# EAGLE board Automaton (EAGLE 5.11)

Size 100 x 80 mm. Coordinates in mm from the lower left corner, seen from the top.
Outline: 0,0 100,0 100,80 0,80 0,0
Copper layers (1*16): Top 0.035mm / dielectric 1.5mm / Bottom 0.035mm
Design rules "default": minimum track width 10mil, minimum drill 24mil, track to track 8mil, track to pad 8mil, pad to pad 8mil, via to via 8mil, smd to smd 8mil, copper to edge 40mil, drill to drill 8mil, minimum pad ring 10mil, minimum via ring 8mil, stop-mask expansion 4mil, vias tented up to drill 0mil, thermal gap 10mil

## Footprints (pad centres in the part's own frame; a part is rotated, then mirrored left to right if it is on the bottom)
C025-024X044 = drill 0.813 octagon: 1 -1.27,0; 2 1.27,0
1210 = smd 1.2 x 2: 1 -1.6,0; 2 1.6,0
SO16 = smd 0.66 x 2.032: 1 -4.445,-3.073; 2 -3.175,-3.073; 3 -1.905,-3.073; 4 -0.635,-3.073; 5 0.635,-3.073; 6 1.905,-3.073; 7 3.175,-3.073; 8 4.445,-3.073; 9 4.445,3.073; 10 3.175,3.073; 11 1.905,3.073; 12 0.635,3.073; 13 -0.635,3.073; 14 -1.905,3.073; 15 -3.175,3.073; 16 -4.445,3.073
SMARTLED-TTW = smd 0.8 x 0.5: A 0,-0.875; C 0,0.875 | smd 0.35 x 0.35: A@1 0,-0.5; C@1 0,0.5
M0805 = smd 1.3 x 1.6: 1 -0.95,0; 2 0.95,0
SOMC16 = smd 1.91 x 0.64: 1 -3.62,4.445; 2 -3.62,3.175; 3 -3.62,1.905; 4 -3.62,0.635; 5 -3.62,-0.635; 6 -3.62,-1.905; 7 -3.62,-3.175; 8 -3.62,-4.445; 9 3.62,-4.445; 10 3.62,-3.175; 11 3.62,-1.905; 12 3.62,-0.635; 13 3.62,0.635; 14 3.62,1.905; 15 3.62,3.175; 16 3.62,4.445
CTS753DRT24 = smd 0.43 x 1.27: 1 -3.525,-0.9; 2 -2.885,-0.9; 3 -2.245,-0.9; 4 -1.605,-0.9; 5 -0.965,-0.9; 6 -0.325,-0.9; 7 0.315,-0.9; 8 0.955,-0.9; 9 1.595,-0.9; 10 2.235,-0.9; 11 2.875,-0.9; 12 3.515,-0.9; 13 3.52,0.9; 14 2.885,0.9; 15 2.245,0.9; 16 1.605,0.9; 17 0.965,0.9; 18 0.325,0.9; 19 -0.315,0.9; 20 -0.955,0.9; 21 -1.595,0.9; 22 -2.235,0.9; 23 -2.875,0.9; 24 -3.515,0.9
EXBV4V = smd 0.45 x 0.7: 1 -0.4,-0.775; 2 0.4,-0.775; 3 0.4,0.775; 4 -0.4,0.775
CTS-219-05 = smd 1.13 x 2.44: 1 -5.08,-4.3; 2 -2.54,-4.3; 3 0,-4.3; 4 2.54,-4.3; 5 5.08,-4.3; 6 5.08,4.3; 7 2.54,4.3; 8 0,4.3; 9 -2.54,4.3; 10 -5.08,4.3
CTS-219-08 = smd 1.13 x 2.44: 1 -8.89,-4.3; 2 -6.35,-4.3; 3 -3.81,-4.3; 4 -1.27,-4.3; 5 1.27,-4.3; 6 3.81,-4.3; 7 6.35,-4.3; 8 8.89,-4.3; 9 8.89,4.3; 10 6.35,4.3; 11 3.81,4.3; 12 1.27,4.3; 13 -1.27,4.3; 14 -3.81,4.3; 15 -6.35,4.3; 16 -8.89,4.3
SWITCH-SPDT_LOCK.007S = drill 1.016 pad 1.88 round: 1 0,2.718; 2 0,0; 3 0,-2.718
EDG-12 = drill 0.813 long: 1 -13.97,-3.81; 2 -11.43,-3.81; 3 -8.89,-3.81; 4 -6.35,-3.81; 5 -3.81,-3.81; 6 -1.27,-3.81; 7 1.27,-3.81; 8 3.81,-3.81; 9 6.35,-3.81; 10 8.89,-3.81; 11 11.43,-3.81; 12 13.97,-3.81; 13 13.97,3.81; 14 11.43,3.81; 15 8.89,3.81; 16 6.35,3.81; 17 3.81,3.81; 18 1.27,3.81; 19 -1.27,3.81; 20 -3.81,3.81; 21 -6.35,3.81; 22 -8.89,3.81; 23 -11.43,3.81; 24 -13.97,3.81
TQFP32-08 = smd 1.27 x 0.559: 1 -4.293,2.8; 2 -4.293,2; 3 -4.293,1.2; 4 -4.293,0.4; 5 -4.293,-0.4; 6 -4.293,-1.2; 7 -4.293,-2; 8 -4.293,-2.8; 17 4.293,-2.8; 18 4.293,-2; 19 4.293,-1.2; 20 4.293,-0.4; 21 4.293,0.4; 22 4.293,1.2; 23 4.293,2; 24 4.293,2.8 | smd 0.559 x 1.27: 9 -2.8,-4.293; 10 -2,-4.293; 11 -1.2,-4.293; 12 -0.4,-4.293; 13 0.4,-4.293; 14 1.2,-4.293; 15 2,-4.293; 16 2.8,-4.293; 25 2.8,4.293; 26 2,4.293; 27 1.2,4.293; 28 0.4,4.293; 29 -0.4,4.293; 30 -1.2,4.293; 31 -2,4.293; 32 -2.8,4.293
TO220H = drill 1.118 long: 1 -2.54,-10.16; 2 0,-10.16; 3 2.54,-10.16 | hole 3.302: 0,4.826

## Placement (x,y rotation side)
C1  0.1uf  [C025-024X044]  -26.67,95.25 0 top  (outside the outline)
C2  0.1uf  [C025-024X044]  -31.75,95.25 0 top  (outside the outline)
C3  [C025-024X044]  -76.2,93.98 0 top  (outside the outline)
C4  10uf  [1210]  -15.24,100.33 0 top  (outside the outline)
C5  100uf  [1210]  -20.32,100.33 0 top  (outside the outline)
IC1  74LS595D  [SO16]  -30.48,66.04 0 top  (outside the outline)
IC2  74LS595D  [SO16]  -43.18,66.04 0 top  (outside the outline)
IC3  74LS595D  [SO16]  -55.88,66.04 0 top  (outside the outline)
IC4  4021D  [SO16]  -68.58,66.04 0 top  (outside the outline)
IC5  4021D  [SO16]  -19.05,78.74 0 top  (outside the outline)
IC6  4021D  [SO16]  -31.75,78.74 0 top  (outside the outline)
IC7  4021D  [SO16]  -44.45,78.74 0 top  (outside the outline)
IC8  4021D  [SO16]  -57.15,78.74 0 top  (outside the outline)
IC9  4021D  [SO16]  -69.85,78.74 0 top  (outside the outline)
IC10  4021D  [SO16]  -19.05,87.63 0 top  (outside the outline)
LED1  [SMARTLED-TTW]  -40.64,93.98 0 top  (outside the outline)
LED2  [SMARTLED-TTW]  -44.45,93.98 0 top  (outside the outline)
LED3  [SMARTLED-TTW]  -48.26,93.98 0 top  (outside the outline)
LED4  [SMARTLED-TTW]  -52.07,93.98 0 top  (outside the outline)
LED5  [SMARTLED-TTW]  -55.88,93.98 0 top  (outside the outline)
LED6  [SMARTLED-TTW]  -59.69,93.98 0 top  (outside the outline)
LED7  [SMARTLED-TTW]  -63.5,93.98 0 top  (outside the outline)
LED8  [SMARTLED-TTW]  -67.31,93.98 0 top  (outside the outline)
LED9  [SMARTLED-TTW]  -71.12,93.98 0 top  (outside the outline)
LED10  [SMARTLED-TTW]  -41.91,85.09 0 top  (outside the outline)
LED11  [SMARTLED-TTW]  -21.59,93.98 0 top  (outside the outline)
LED12  [SMARTLED-TTW]  -45.72,85.09 0 top  (outside the outline)
LED13  [SMARTLED-TTW]  -49.53,85.09 0 top  (outside the outline)
LED14  [SMARTLED-TTW]  -53.34,85.09 0 top  (outside the outline)
LED15  [SMARTLED-TTW]  -57.15,85.09 0 top  (outside the outline)
LED16  [SMARTLED-TTW]  -60.96,85.09 0 top  (outside the outline)
LED17  [SMARTLED-TTW]  -64.77,85.09 0 top  (outside the outline)
LED18  [SMARTLED-TTW]  -68.58,85.09 0 top  (outside the outline)
LED19  [SMARTLED-TTW]  -72.39,85.09 0 top  (outside the outline)
LED20  [SMARTLED-TTW]  -76.2,85.09 0 top  (outside the outline)
LED21  [SMARTLED-TTW]  -80.01,85.09 0 top  (outside the outline)
LED22  [SMARTLED-TTW]  -83.82,85.09 0 top  (outside the outline)
LED23  [SMARTLED-TTW]  -13.97,93.98 0 top  (outside the outline)
LED24  [SMARTLED-TTW]  -17.78,93.98 0 top  (outside the outline)
R1  10k  [M0805]  -36.83,95.25 0 top  (outside the outline)
RN1  68  [SOMC16]  -52.07,26.67 0 top  (outside the outline)
RN2  68  [SOMC16]  -62.23,26.67 0 top  (outside the outline)
RN3  68  [SOMC16]  -72.39,26.67 0 top  (outside the outline)
RN4  [SOMC16]  -82.55,26.67 0 top  (outside the outline)
RN5  [SOMC16]  -17.78,41.91 0 top  (outside the outline)
RN6  [SOMC16]  -27.94,41.91 0 top  (outside the outline)
RN7  [SOMC16]  -38.1,41.91 0 top  (outside the outline)
RN8  CTS753DRT24  [CTS753DRT24]  -34.29,87.63 0 top  (outside the outline)
RN9  [EXBV4V]  -81.28,93.98 0 top  (outside the outline)
S1  219-05  [CTS-219-05]  -49.53,55.88 0 top  (outside the outline)
S2  219-08  [CTS-219-08]  -57.15,41.91 0 top  (outside the outline)
S3  219-08  [CTS-219-08]  -26.67,55.88 0 top  (outside the outline)
S4  219-05  [CTS-219-05]  -68.58,55.88 0 top  (outside the outline)
S5  [SWITCH-SPDT_LOCK.007S]  -31.75,6.35 0 top  (outside the outline)
SW1  [EDG-12]  -53.34,6.35 0 top  (outside the outline)
SW2  [EDG-12]  -30.48,27.94 0 top  (outside the outline)
U$1  MEGA328P-AU  [TQFP32-08]  -19.05,67.31 0 top  (outside the outline)
U$2  LM323  [TO220H]  -21.59,12.7 0 top  (outside the outline)

## Library data of the parts
C1-C3 R1 = resistor
C4 C5 S5 = SparkFun
IC1-IC3 = 74xx-us
IC4-IC10 = 40xx
LED1-LED24 = led
RN1-RN7 RN9 = resistor-dil; OC_FARNELL: unknown; OC_NEWARK: unknown
RN8 = resistor-net; OC_FARNELL: unknown; OC_NEWARK: unknown
S1-S4 = switch-dil; OC_FARNELL: unknown; OC_NEWARK: unknown
SW1 SW2 = special
U$1 = MyAtmel
U$2 = MyLib

## Nets
5V: C1.1 C2.1 C3.1 C5.2 R1.2 S1.6 S1.7 S1.8 S1.9 S1.10 S2.9 S2.10 S2.11 S2.12 S2.13 S2.14 S2.15 S2.16 S3.9 S3.10 S3.11 S3.12 S3.13 S3.14 S3.15 S3.16 S4.6 S4.7 S4.8 S4.9 S4.10 SW1.13 SW1.14 SW1.15 SW1.16 SW1.17 SW1.18 SW1.19 SW1.20 SW1.21 SW1.22 SW1.23 SW1.24 SW2.13 SW2.14 SW2.15 SW2.16 SW2.17 SW2.18 SW2.19 SW2.20 SW2.21 SW2.22 SW2.23 SW2.24 U$1.4 U$1.6 U$1.18 U$2.3
GND: C1.2 C2.2 C3.2 IC1.8 IC1.10 IC2.8 IC2.10 IC3.8 IC3.10 IC4.11 IC6.11 IC8.11 LED1.C@1 LED2.C@1 LED3.C@1 LED4.C@1 LED5.C@1 LED6.C@1 LED7.C@1 LED8.C@1 LED9.C@1 LED10.C@1 LED11.C@1 LED12.C@1 LED13.C@1 LED14.C@1 LED15.C@1 LED16.C@1 LED17.C@1 LED18.C@1 LED19.C@1 LED20.C@1 LED21.C@1 LED22.C@1 LED23.C@1 LED24.C@1 RN4.9 RN4.10 RN4.11 RN4.12 RN4.13 RN4.14 RN4.15 RN4.16 RN5.9 RN5.10 RN5.11 RN5.12 RN5.13 RN5.14 RN5.15 RN5.16 RN6.9 RN6.10 RN6.11 RN6.12 RN6.13 RN6.14 RN6.15 RN6.16 RN7.9 RN7.10 RN7.11 RN7.12 RN7.13 RN7.14 RN7.15 RN7.16 RN8.1 RN8.24 RN9.3 RN9.4 U$1.3 U$1.5 U$1.21
INITIAL_STATE_1: IC10.1 RN8.2 SW2.1
INITIAL_STATE_2: IC10.15 RN8.3 SW2.2
INITIAL_STATE_3: IC10.14 RN8.4 SW2.3
INITIAL_STATE_4: IC10.13 RN8.5 SW2.4
INITIAL_STATE_5: IC10.4 RN8.6 SW2.5
INITIAL_STATE_6: IC10.5 RN8.7 SW2.6
INITIAL_STATE_7: IC10.6 RN8.8 SW2.7
INITIAL_STATE_8: IC10.7 RN8.9 SW2.8
INITIAL_STATE_9: IC9.1 RN8.10 SW2.9
INITIAL_STATE_10: IC9.15 RN8.11 SW2.10
INITIAL_STATE_11: IC9.14 RN8.12 SW2.11
INITIAL_STATE_12: IC9.13 RN8.13 SW2.12
INITIAL_STATE_13: IC9.4 RN8.14 SW1.1
INITIAL_STATE_14: IC9.5 RN8.15 SW1.2
INITIAL_STATE_15: IC9.6 RN8.16 SW1.3
INITIAL_STATE_16: IC9.7 RN8.17 SW1.4
INITIAL_STATE_17: IC8.1 RN8.18 SW1.5
INITIAL_STATE_18: IC8.15 RN8.19 SW1.6
INITIAL_STATE_19: IC8.14 RN8.20 SW1.7
INITIAL_STATE_20: IC8.13 RN8.21 SW1.8
INITIAL_STATE_21: IC8.4 RN8.22 SW1.9
INITIAL_STATE_22: IC8.5 RN8.23 SW1.10
INITIAL_STATE_23: IC8.6 RN9.1 SW1.11
INITIAL_STATE_24: IC8.7 RN9.2 SW1.12
INITIAL_STATE_CP: IC8.10 IC9.10 IC10.10 U$1.23
INITIAL_STATE_DO: IC10.3 U$1.25
INITIAL_STATE_PS: IC8.9 IC9.9 IC10.9 U$1.24
INITIAL_STATE_SI_1: IC8.3 IC9.11
INITIAL_STATE_SI_2: IC9.3 IC10.11
LED_1: IC3.15 RN1.9
LED_2: IC3.1 RN1.10
LED_3: IC3.2 RN1.11
LED_4: IC3.3 RN1.12
LED_5: IC3.4 RN1.13
LED_6: IC3.5 RN1.14
LED_7: IC3.6 RN1.15
LED_8: IC3.7 RN1.16
LED_9: IC2.15 RN2.9
LED_10: IC2.1 RN2.10
LED_11: IC2.2 RN2.11
LED_12: IC2.3 RN2.12
LED_13: IC2.4 RN2.13
LED_14: IC2.5 RN2.14
LED_15: IC2.6 RN2.15
LED_16: IC2.7 RN2.16
LED_17: IC1.15 RN3.9
LED_18: IC1.1 RN3.10
LED_19: IC1.2 RN3.11
LED_20: IC1.3 RN3.12
LED_21: IC1.4 RN3.13
LED_22: IC1.5 RN3.14
LED_23: IC1.6 RN3.15
LED_24: IC1.7 RN3.16
LED_RCLK: IC3.12
LEDS_IC2_SER: IC1.9 IC2.14
LEDS_IC3_SER: IC2.9 IC3.14
LEDS_RCLK: IC1.12 IC2.12 U$1.12
LEDS_SER: IC1.14 U$1.13
LEDS_SRCLK: IC1.11 IC2.11 IC3.11 U$1.14
N$1: LED24.A@1 RN3.1
N$2: C4.2 S5.1 U$2.1
N$3: LED23.A@1 RN3.2
N$4: C4.1 C5.1 U$2.2
N$5: LED22.A@1 RN3.3
N$6: LED21.A@1 RN3.4
N$7: LED20.A@1 RN3.5
N$8: LED19.A@1 RN3.6
N$9: LED18.A@1 RN3.7
N$10: LED17.A@1 RN3.8
N$11: LED16.A@1 RN2.1
N$12: LED15.A@1 RN2.2
N$13: LED14.A@1 RN2.3
N$14: LED13.A@1 RN2.4
N$15: LED12.A@1 RN2.5
N$16: LED11.A@1 RN2.6
N$17: LED10.A@1 RN2.7
N$18: LED9.A@1 RN2.8
N$19: LED8.A@1 RN1.1
N$20: LED7.A@1 RN1.2
N$21: LED6.A@1 RN1.3
N$22: LED5.A@1 RN1.4
N$23: LED4.A@1 RN1.5
N$24: LED3.A@1 RN1.6
N$25: LED2.A@1 RN1.7
N$26: LED1.A@1 RN1.8
N$32: R1.1 U$1.29
RULES_BIRTH_1: IC7.1 RN7.1 S3.1
RULES_BIRTH_2: IC7.15 S3.2
RULES_BIRTH_3: IC7.14 RN7.3 S3.3
RULES_BIRTH_4: IC7.13 RN7.4 S3.4
RULES_BIRTH_5: IC7.4 RN7.5 S3.5
RULES_BIRTH_6: IC7.5 RN7.6 S3.6
RULES_BIRTH_7: IC7.6 RN7.7 S3.7
RULES_BIRTH_8: IC7.7 RN7.8 S3.8
RULES_BIRTH_9: IC6.1 RN6.1 S4.1
RULES_BIRTH_10: IC6.15 RN6.2 S4.2
RULES_BIRTH_11: IC6.14 RN6.3 S4.3
RULES_BIRTH_12: IC6.13 RN6.4 S4.4
RULES_BIRTH_13: IC6.4 RN6.5 S4.5
RULES_BIRTH_14: IC6.5 RN6.6
RULES_BIRTH_15: IC6.6 RN6.7
RULES_BIRTH_16: IC6.7 RN6.8
RULES_BIRTH_CP: IC6.10 IC7.10 U$1.10
RULES_BIRTH_DO: IC7.3 U$1.9
RULES_BIRTH_PS: IC6.9 IC7.9 U$1.11
RULES_BIRTH_SI: IC6.3 IC7.11
RULES_SURV_1: IC5.1 RN5.1 S2.1
RULES_SURV_2: IC5.15 RN5.2 S2.2
RULES_SURV_3: IC5.14 RN5.3 S2.3
RULES_SURV_4: IC5.13 RN5.4 S2.4
RULES_SURV_5: IC5.4 RN5.5 S2.5
RULES_SURV_6: IC5.5 RN5.6 S2.6
RULES_SURV_7: IC5.6 RN5.7 S2.7
RULES_SURV_8: IC5.7 RN5.8 S2.8
RULES_SURV_9: IC4.1 RN4.1 S1.1
RULES_SURV_10: IC4.15 RN4.2 S1.2
RULES_SURV_11: IC4.14 RN4.3 S1.3
RULES_SURV_12: IC4.13 RN4.4 S1.4
RULES_SURV_13: IC4.4 RN4.5 S1.5
RULES_SURV_14: IC4.5 RN4.6
RULES_SURV_15: IC4.6 RN4.7
RULES_SURV_16: IC4.7 RN4.8
RULES_SURV_CP: IC4.10 IC5.10 U$1.32
RULES_SURV_DO: IC5.3 U$1.2
RULES_SURV_PS: IC4.9 IC5.9 U$1.1
RULES_SURV_SI: IC4.3 IC5.11
VCC: IC1.16 IC2.16 IC3.16 S5.2
VDD: IC4.16 IC5.16 IC6.16 IC7.16 IC8.16 IC9.16 IC10.16
VSS: IC4.8 IC5.8 IC6.8 IC7.8 IC8.8 IC9.8 IC10.8

## Tracks (layer width: path | path; a pad name or v marks a point on that pad's centre or on a via)
5V  (58 unrouted)
GND  (74 unrouted)
INITIAL_STATE_1  (2 unrouted)
INITIAL_STATE_2  (2 unrouted)
INITIAL_STATE_3  (2 unrouted)
INITIAL_STATE_4  (2 unrouted)
INITIAL_STATE_5  (2 unrouted)
INITIAL_STATE_6  (2 unrouted)
INITIAL_STATE_7  (2 unrouted)
INITIAL_STATE_8  (2 unrouted)
INITIAL_STATE_9  (2 unrouted)
INITIAL_STATE_10  (2 unrouted)
INITIAL_STATE_11  (2 unrouted)
INITIAL_STATE_12  (2 unrouted)
INITIAL_STATE_13  (2 unrouted)
INITIAL_STATE_14  (2 unrouted)
INITIAL_STATE_15  (2 unrouted)
INITIAL_STATE_16  (2 unrouted)
INITIAL_STATE_17  (2 unrouted)
INITIAL_STATE_18  (2 unrouted)
INITIAL_STATE_19  (2 unrouted)
INITIAL_STATE_20  (2 unrouted)
INITIAL_STATE_21  (2 unrouted)
INITIAL_STATE_22  (2 unrouted)
INITIAL_STATE_23  (2 unrouted)
INITIAL_STATE_24  (2 unrouted)
INITIAL_STATE_CP  (3 unrouted)
INITIAL_STATE_DO  (1 unrouted)
INITIAL_STATE_PS  (3 unrouted)
INITIAL_STATE_SI_1  (1 unrouted)
INITIAL_STATE_SI_2  (1 unrouted)
LED_1  (1 unrouted)
LED_2  (1 unrouted)
LED_3  (1 unrouted)
LED_4  (1 unrouted)
LED_5  (1 unrouted)
LED_6  (1 unrouted)
LED_7  (1 unrouted)
LED_8  (1 unrouted)
LED_9  (1 unrouted)
LED_10  (1 unrouted)
LED_11  (1 unrouted)
LED_12  (1 unrouted)
LED_13  (1 unrouted)
LED_14  (1 unrouted)
LED_15  (1 unrouted)
LED_16  (1 unrouted)
LED_17  (1 unrouted)
LED_18  (1 unrouted)
LED_19  (1 unrouted)
LED_20  (1 unrouted)
LED_21  (1 unrouted)
LED_22  (1 unrouted)
LED_23  (1 unrouted)
LED_24  (1 unrouted)
LEDS_IC2_SER  (1 unrouted)
LEDS_IC3_SER  (1 unrouted)
LEDS_RCLK  (2 unrouted)
LEDS_SER  (1 unrouted)
LEDS_SRCLK  (3 unrouted)
N$1  (1 unrouted)
N$2  (2 unrouted)
N$3  (1 unrouted)
N$4  (2 unrouted)
N$5  (1 unrouted)
N$6  (1 unrouted)
N$7  (1 unrouted)
N$8  (1 unrouted)
N$9  (1 unrouted)
N$10  (1 unrouted)
N$11  (1 unrouted)
N$12  (1 unrouted)
N$13  (1 unrouted)
N$14  (1 unrouted)
N$15  (1 unrouted)
N$16  (1 unrouted)
N$17  (1 unrouted)
N$18  (1 unrouted)
N$19  (1 unrouted)
N$20  (1 unrouted)
N$21  (1 unrouted)
N$22  (1 unrouted)
N$23  (1 unrouted)
N$24  (1 unrouted)
N$25  (1 unrouted)
N$26  (1 unrouted)
N$32  (1 unrouted)
RULES_BIRTH_1  (2 unrouted)
RULES_BIRTH_2  (1 unrouted)
RULES_BIRTH_3  (2 unrouted)
RULES_BIRTH_4  (2 unrouted)
RULES_BIRTH_5  (2 unrouted)
RULES_BIRTH_6  (2 unrouted)
RULES_BIRTH_7  (2 unrouted)
RULES_BIRTH_8  (2 unrouted)
RULES_BIRTH_9  (2 unrouted)
RULES_BIRTH_10  (2 unrouted)
RULES_BIRTH_11  (2 unrouted)
RULES_BIRTH_12  (2 unrouted)
RULES_BIRTH_13  (2 unrouted)
RULES_BIRTH_14  (1 unrouted)
RULES_BIRTH_15  (1 unrouted)
RULES_BIRTH_16  (1 unrouted)
RULES_BIRTH_CP  (2 unrouted)
RULES_BIRTH_DO  (1 unrouted)
RULES_BIRTH_PS  (2 unrouted)
RULES_BIRTH_SI  (1 unrouted)
RULES_SURV_1  (2 unrouted)
RULES_SURV_2  (2 unrouted)
RULES_SURV_3  (2 unrouted)
RULES_SURV_4  (2 unrouted)
RULES_SURV_5  (2 unrouted)
RULES_SURV_6  (2 unrouted)
RULES_SURV_7  (2 unrouted)
RULES_SURV_8  (2 unrouted)
RULES_SURV_9  (2 unrouted)
RULES_SURV_10  (2 unrouted)
RULES_SURV_11  (2 unrouted)
RULES_SURV_12  (2 unrouted)
RULES_SURV_13  (2 unrouted)
RULES_SURV_14  (1 unrouted)
RULES_SURV_15  (1 unrouted)
RULES_SURV_16  (1 unrouted)
RULES_SURV_CP  (2 unrouted)
RULES_SURV_DO  (1 unrouted)
RULES_SURV_PS  (2 unrouted)
RULES_SURV_SI  (1 unrouted)
VCC  (3 unrouted)
VDD  (6 unrouted)
VSS  (6 unrouted)